# Altium PCB STM32F302VC_EVM.PcbDoc (part 19 of 19)
Units mil, origin at the board's own origin, x right, y up, seen from the top; angles counter-clockwise.
Board outline 3937.01 x 3937.01 mil, 2 copper layers (Top Layer, Bottom Layer); 117 components, 166 nets, 602 pads, 373 vias.
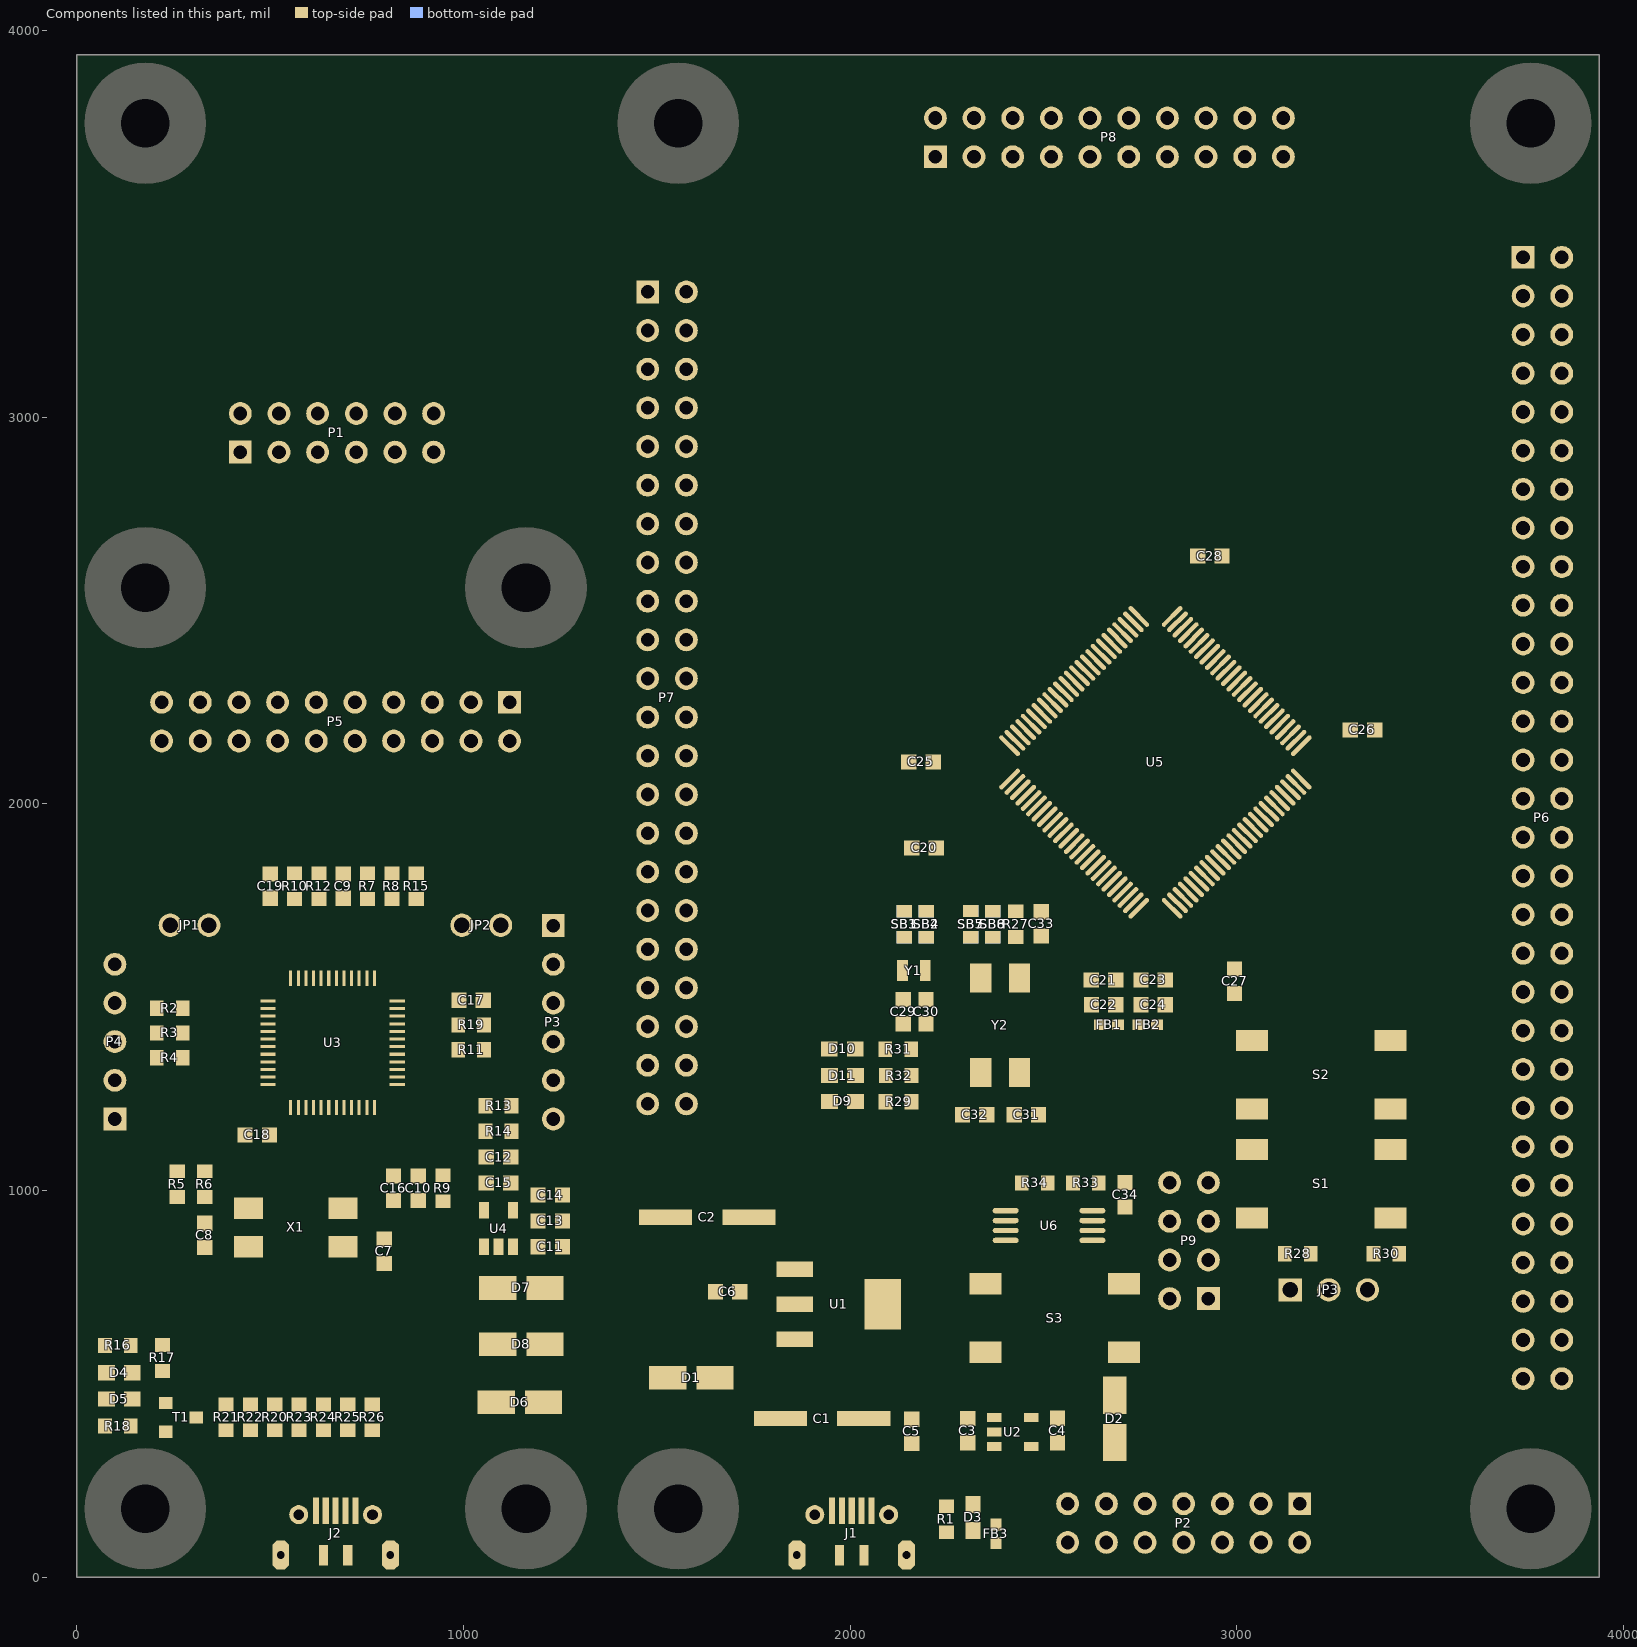
[diagram p19: the components of this part, seen from the top]

## Silkscreen, mask and mechanical layers (free items; w line width, h text height)
Top Overlay:
  lines w6: 1626.38,1174.02 1626.38,1079.72 1864.17,1079.72 1864.17,3374.02 1626.38,3374.02 ; 1626.38,1274.02 1864.17,1274.02 ; 1626.38,1374.02 1864.17,1374.02 ; 1626.38,1474.02 1864.17,1474.02 ; 1626.38,1574.02 1864.17,1574.02 ; 1626.38,1674.02 1864.17,1674.02 ; 1626.38,1774.02 1864.17,1774.02 ; 1626.38,1874.02 1864.17,1874.02 ; 1626.38,1974.02 1864.17,1974.02 ; 1626.38,2074.02 1864.17,2074.02 ; 1626.38,2174.02 1864.17,2174.02 ; 1626.38,2274.02 1864.17,2274.02 ; 1626.38,2374.02 1864.17,2374.02 ; 1626.38,2474.02 1864.17,2474.02 ; 1626.38,2574.02 1864.17,2574.02 ; 1626.38,2674.02 1864.17,2674.02 ; 1626.38,2774.02 1864.17,2774.02 ; 1626.38,2874.02 1864.17,2874.02 ; 1626.38,2974.02 1864.17,2974.02 ; 1626.38,3074.02 1864.17,3074.02 ; 1626.38,3174.02 1864.17,3174.02 ; 1745.28,1079.72 1745.28,3374.02 ; 3454.53,2563.38 3689.96,2563.38 ; 3454.53,2963.38 3689.96,2963.38 ; 3454.72,963.39 3690.16,963.39 ; 3454.72,1063.39 3690.16,1063.39 ; 3454.72,1163.39 3690.16,1163.39 ; 3454.72,1263.39 3690.16,1263.39 ; 3454.72,1463.39 3690.16,1463.39 ; 3454.72,1563.39 3690.16,1563.39 ; 3454.72,1663.39 3690.16,1663.39 ; 3454.72,1763.39 3690.16,1763.39 ; 3454.72,1863.39 3690.16,1863.39 ; 3454.72,1963.38 3690.16,1963.38 ; 3454.72,2063.38 3690.16,2063.38 ; 3454.72,2163.38 3690.16,2163.38 ; 3454.72,2263.38 3690.16,2263.38 ; 3454.72,2363.38 3690.16,2363.38 ; 3454.72,2463.38 3690.16,2463.38 ; 3454.72,2663.38 3690.16,2663.38 ; 3454.72,2763.38 3690.16,2763.38 ; 3454.72,2863.38 3690.16,2863.38 ; 3454.72,3063.38 3690.16,3063.38 ; 3454.72,3163.38 3690.16,3163.38 ; 3454.72,3263.38 3690.16,3263.38 ; 3454.72,3363.38 3690.16,3363.38 ; 3455.51,1363.39 3690.94,1363.39 ; 3573.82,458.27 3573.82,3569.88 ; 3690.16,458.27 3454.72,458.27 3454.72,3569.88 3690.16,3569.88 3690.16,3463.38
  lines w7.87: 372.83,3059.45 372.83,3546.09 373,3546.26 972.83,3546.26 972.83,3059.45 ; 372.83,3292.32 972.83,3292.32 ; 470.47,3059.45 470.47,3546.26 ; 574.8,3059.45 574.8,3546.26 ; 672.83,3059.45 672.83,3546.18 ; 773.62,3059.45 773.62,3546.26 ; 872.05,3060.04 872.05,3546.26 ; 2170.28,3305.12 3170.28,3305.12 ; 2270.28,2943.9 2270.28,3494.09 ; 2370.28,2943.9 2370.28,3494.09 ; 2470.28,2943.9 2470.28,3494.09 ; 2570.28,2943.9 2570.28,3494.09 ; 2670.28,2943.9 2670.28,3494.09 ; 2762.4,240.16 2762.4,573.82 3212.4,573.82 3212.4,239.96 ; 2770.28,2943.9 2770.28,3494.09 ; 2826.77,240.94 2826.77,574.8 ; 2826.77,421.26 3212.4,421.26 ; 2870.28,2943.9 2870.28,3494.09 ; 2914.37,239.96 2914.37,573.82 ; 2970.28,2943.9 2970.28,3494.09 ; 3016.73,239.96 3016.73,573.82 ; 3070.28,2943.9 3070.28,3494.09 ; 3110.24,240.94 3110.24,573.82 ; 2170.28,2943.9 3170.28,2943.9 3170.28,3494.09 2170.28,3494.09 2170.28,2943.9
  text "+3V3" at 3607.28,3529.53 h39.37 r270
  text "NRST" at 403.54,3501.97 h39.37 r270
  text "PA14" at 503.54,3501.97 h39.37 r270
  text "PA13" at 603.54,3501.97 h39.37 r270
  text "PB3" at 703.54,3501.97 h39.37 r270
  text "PA2" at 803.54,3501.97 h39.37 r270
  text "PA3" at 903.54,3501.97 h39.37 r270
  text "+3V3" at 2197.83,3476.38 h39.37 r270
  text "GND" at 2301.07,3460.83 h39.37 r270
  text "GND" at 2400.37,3460.83 h39.37 r270
  text "GND" at 2499.67,3460.83 h39.37 r270
  text "GND" at 2598.97,3460.83 h39.37 r270
  text "GND" at 2698.27,3460.83 h39.37 r270
  text "GND" at 2797.57,3460.83 h39.37 r270
  text "GND" at 2896.87,3460.83 h39.37 r270
  text "GND" at 2996.17,3460.83 h39.37 r270
  text "GND" at 3095.47,3460.83 h39.37 r270
  text "F6" at 3470.75,3390.75 h39.37
  text "+3V3" at 1667.32,3341.54 h39.37 r270
  text "GND" at 1785.43,3310.04 h39.37 r270
  text "JTAG" at 3224.41,3295.28 h39.37 r270
  text "A12" at 3464.57,3291.13 h39.37
  text "A13" at 3582.68,3291.13 h39.37
  text "nTRST(B4)" at 2303.15,3279.53 h39.37 r270
  text "nTRST" at 399.61,3269.69 h39.37 r270
  text "TCK" at 503.94,3269.69 h39.37 r270
  text "TMS" at 603.35,3269.68 h39.37 r270
  text "TDO" at 700.79,3269.69 h39.37 r270
  text "RXD" at 804.13,3269.68 h39.37 r270
  text "TXD" at 901.57,3269.69 h39.37 r270
  text "TDI(A15)" at 2402.56,3243.11 h39.37 r270
  text "TMS(A13)" at 2499.67,3243.11 h39.37 r270
  text "TCK(A14)" at 2601.54,3243.11 h39.37 r270
  text "TDO(B3)" at 2799.17,3243.11 h39.37 r270
  text "NRST" at 2902.56,3229.33 h39.37 r270
  text "NC" at 2702.76,3219.49 h39.37 r270
  text "NC" at 2997.93,3219.49 h39.37 r270
  text "NC" at 3095.47,3219.49 h39.37 r270
  text "A10" at 3464.57,3191.52 h39.37
  text "A11" at 3591.54,3191.52 h39.37
  text "+3V3" at 2197.83,3190.94 h39.37 r270
  text "A14" at 1637.64,3104.33 h39.37
  text "A15" at 1755.91,3104.33 h39.37
  text "A8" at 3476.94,3091.9 h39.37
  text "A9" at 3599.41,3091.9 h39.37
  text "C10" at 1636.81,3004.32 h39.37
  text "C11" at 1761.81,3004.32 h39.37
  text "C8" at 3476.94,2992.29 h39.37
  text "C9" at 3599.41,2992.29 h39.37
  text "C12" at 1637.64,2904.31 h39.37
  text "D0" at 1769.68,2904.31 h39.37
  text "C6" at 3476.94,2892.68 h39.37
  text "C7" at 3601.38,2892.68 h39.37
  text "D1" at 1665.35,2804.3 h39.37
  text "D2" at 1770.67,2804.3 h39.37
  text "D14" at 3464.57,2793.06 h39.37
  text "D15" at 3581.69,2793.06 h39.37
  text "D3" at 1654.53,2704.29 h39.37
  text "D4" at 1776.57,2704.29 h39.37
  text "D12" at 3464.57,2693.45 h39.37
  text "D13" at 3582.68,2693.45 h39.37
  text "D5" at 1655.51,2604.28 h39.37
  text "D6" at 1774.61,2604.28 h39.37
  text "D10" at 3464.57,2593.83 h39.37
  text "D11" at 3590.55,2593.83 h39.37
  text "nTRST" at 401.57,2585.63 h39.37 r270
  text "TDO" at 496.77,2547.29 h39.37 r270
  text "TCK" at 699.49,2547.29 h39.37 r270
  text "TMS" at 798.23,2542.32 h39.37 r270
  text "D7" at 1656.5,2504.26 h39.37
  text "B3" at 1776.57,2504.26 h39.37
  text "D8" at 3480.03,2494.22 h39.37
  text "D9" at 3598.43,2494.22 h39.37
  text "B4" at 1654.53,2404.25 h39.37
  text "B5" at 1776.57,2404.25 h39.37
  text "B14" at 3467.66,2394.6 h39.37
  text "B15" at 3581.69,2394.6 h39.37
  text "B6" at 1655.51,2304.24 h39.37
  text "B7" at 1777.06,2304.24 h39.37
  text "B12" at 3467.66,2294.99 h39.37
  text "B13" at 3582.68,2294.99 h39.37
  text "B8" at 1654.53,2204.23 h39.37
  text "B9" at 1775.59,2204.23 h39.37
  text "B10" at 3464.57,2195.37 h39.37
  text "B11" at 3591.54,2195.37 h39.37
  text "E0" at 1654.53,2104.22 h39.37
  text "E1" at 1782.48,2104.22 h39.37
  text "E14" at 3467.66,2095.76 h39.37
  text "E15" at 3582.68,2095.76 h39.37
  text "E2" at 1655.51,2004.21 h39.37
  text "E3" at 1780.51,2004.21 h39.37
  text "E12" at 3464.57,1996.14 h39.37
  text "E13" at 3582.68,1996.14 h39.37
  text "E5V" at 1191.93,1990.28 h31.5
  text "MCO" at 1191.93,1941.02 h31.5
  text "E4" at 1655.51,1904.2 h39.37
  text "E5" at 1779.53,1904.2 h39.37
  text "PWR_ENn" at 1085.5,1897.01 h31.5
  text "E10" at 3464.57,1896.53 h39.37
  text "E11" at 3591.54,1896.53 h39.37
  text "GND" at 60.04,1862.2 h31.5
  text "TXD" at 1191.93,1842.5 h31.5
  text "JRST" at 45.28,1806.1 h31.5
  text "E6" at 1655.51,1804.19 h39.37
  text "C13" at 1755.91,1804.19 h39.37
  text "E8" at 3480.03,1796.92 h39.37
  text "E9" at 3597.44,1796.92 h39.37
  text "RXD" at 1191.93,1793.25 h31.5
  text "JTMS" at 44.29,1754.92 h31.5
  text "GND" at 1191.93,1743.99 h31.5
  text "JTCK" at 44.29,1706.19 h31.5
  text "C14" at 1637.8,1704.18 h39.37
  text "C15" at 1755.91,1704.18 h39.37
  text "B2" at 3480.03,1697.3 h39.37
  text "E7" at 3601.38,1697.3 h39.37
  text "+3V3" at 38.39,1657.34 h31.5
  text "F9" at 1657.48,1604.17 h39.37
  text "F10" at 1756.29,1604.17 h39.37
  text "B0" at 3480.03,1597.69 h39.37
  text "B1" at 3602.36,1597.69 h39.37
  text "F0" at 1655.51,1504.16 h39.37
  text "F1" at 1781.5,1504.16 h39.37
  text "C4" at 3480.03,1498.07 h39.37
  text "C5" at 3597.44,1498.07 h39.37
  text "C0" at 1656.5,1404.14 h39.37
  text "C1" at 1784.45,1404.14 h39.37
  text "A6" at 3479.33,1398.62 h39.37
  text "A7" at 3599.41,1398.46 h39.37
  text "C2" at 1657.48,1304.13 h39.37
  text "C3" at 1776.57,1304.13 h39.37
  text "A4" at 3480.31,1299.21 h39.37
  text "A5" at 3595.47,1298.84 h39.37
  text "+3V3" at 1662.4,1246.06 h39.37 r270
  text "GND" at 1787.4,1238.19 h39.37 r270
  text "A3" at 3479.33,1198.82 h39.37
  text "F4" at 3601.38,1199.23 h39.37
  text "SPI" at 2877.42,1134.84 h39.37
  text "A1" at 3486.22,1099.61 h39.37
  text "A2" at 3600.39,1099.61 h39.37
  text "F2" at 3483.13,1000 h39.37
  text "A0" at 3600.39,1000 h39.37
  text "+3V3" at 3610.24,780.51 h39.37 r270
  text "GND" at 3494.09,750 h39.37 r270
  text "BOOT0" at 3226.38,676.18 h31.5 r270
  text "LO" at 3326.77,654.53 h31.5 r270
  text "HI" at 3120.28,652.56 h31.5 r270
  text "+2V5" at 3156.5,562.99 h31.5 r270
  text "+3V3" at 3050.2,562.01 h31.5 r270
  text "+3V3" at 2953.74,561.02 h31.5 r270
  text "VIN" at 2851.38,534.45 h31.5 r270
  text "AGNDx6" at 2779.53,500.98 h31.5 r270
  text "VREF+" at 3156.5,400.59 h31.5 r270
  text "VBAT" at 2951.77,398.25 h31.5 r270
  text "AVDD" at 3049.21,395.08 h31.5 r270
  text "GND" at 2850.42,383.86 h31.5 r270
Bottom Overlay:
  lines w7.87: 162.4,1919.29 1186.02,1919.29 ; 268.7,1745.08 268.7,2120.97 ; 368.11,1745.08 368.11,2120.97 ; 468.5,1745.08 468.5,2120.97 ; 568.9,1745.08 568.9,2120.97 ; 668.31,1745.08 668.31,2120.97 ; 768.7,1745.08 768.7,2120.97 ; 869.09,1745.08 869.09,2120.97 ; 968.5,1745.08 968.5,2120.97 ; 1070.87,1745.08 1070.87,2120.97 ; 162.4,1745.08 1186.02,1745.08 1186.02,2120.97 162.4,2120.97 162.4,1745.08
  text "2-May-2019" at 3420.28,2535.43 h39.37 r270
  text "STM32F302VCT6 EVM" at 3519.69,2420.28 h39.37 r270
  text "NC" at 195.6,1973.43 h39.37 r270
  text "NC" at 294.29,1973.43 h39.37 r270
  text "NC" at 602.36,1973.43 h39.37 r270
  text "NC" at 903.54,1973.43 h39.37 r270
  text "NC" at 1003.94,1973.43 h39.37 r270
  text "TDO" at 502.95,1955.71 h39.37 r270
  text "TCK" at 706.05,1951.77 h39.37 r270
  text "TMS" at 801.18,1951.77 h39.37 r270
  text "TVCC" at 1102.36,1941.93 h39.37 r270
  text "nSRST" at 403.54,1928.15 h39.37 r270
  text "GND" at 193.59,1776.58 h39.37 r270
  text "GND" at 298.38,1776.58 h39.37 r270
  text "GND" at 402.17,1776.58 h39.37 r270
  text "GND" at 504.54,1776.58 h39.37 r270
  text "GND" at 609.85,1776.58 h39.37 r270
  text "GND" at 707.29,1776.58 h39.37 r270
  text "GND" at 810.1,1776.58 h39.37 r270
  text "GND" at 902.59,1776.58 h39.37 r270
  text "GND" at 1003.55,1776.58 h39.37 r270
  text "TVCC" at 1102.36,1756.9 h39.37 r270
  text "2-May-2019" at 360.68,910.43 h39.37 r270
  text "ST-LINK V2.1" at 456.69,883.86 h39.37 r270
Drill Drawing:
  text ".Legend" at 3661.42,-121.06 h39.37

## Text inside footprints (layer, text, board x,y; h text height)
C1: Top Overlay "+" at 2018.49,495.61 h59.06 r180
C2: Top Overlay "+" at 1721.24,1016.28 h59.06 r180
P1: Top Overlay "2" at 322.83,2989.45 h50; Top Overlay "1" at 322.83,2889.45 h50; Top Overlay "1" at 1002.83,2889.45 h50; Top Overlay "1" at 1042.83,2889.45 h50; Top Overlay "12" at 1002.83,2989.45 h50
P2: Top Overlay "2" at 3282.4,109.96 h50 r180; Top Overlay "1" at 3282.4,209.96 h50 r180; Top Overlay "14" at 2482.4,109.96 h50 r180; Top Overlay "13" at 2482.4,209.96 h50 r180
P5: Top Overlay "2" at 1249.29,2157.6 h47.24 r180; Top Overlay "1" at 1239.29,2317.6 h47.24 r180; Top Overlay "19" at 154.29,2322.6 h47.24 r180; Top Overlay "20" at 154.29,2152.6 h47.24 r180
P6: Top Overlay "2" at 3820.16,3513.39 h50 r270; Top Overlay "1" at 3720.16,3513.39 h50 r270; Top Overlay "59" at 3720.16,433.39 h50 r270; Top Overlay "60" at 3820.16,433.39 h50 r270; Bottom Overlay "1" at 3720.16,5613.39 h50 r270
P7: Top Overlay "43" at 1456.38,1164.02 h50 r270; Top Overlay "44" at 1556.38,1164.02 h50 r270; Top Overlay "1" at 1456.38,3424.02 h50 r270; Top Overlay "2" at 1556.38,3424.02 h50 r270
P8: Top Overlay "2" at 2090.28,3778.43 h47.24; Top Overlay "1" at 2100.28,3618.43 h47.24; Top Overlay "19" at 3185.28,3613.43 h47.24; Top Overlay "20" at 3185.28,3783.43 h47.24
P9: Top Overlay "2" at 2846.18,620.47 h50 r90; Top Overlay "1" at 2946.18,640.47 h50 r90; Top Overlay "7" at 2946.18,1080.47 h50 r90; Top Overlay "8" at 2846.18,1080.47 h50 r90